# Altium PCB PCB Latest update for Design Rule check Errors Findings.PcbDoc
Units mm, origin at the board's own origin, x right, y up, seen from the top; angles counter-clockwise.
Board outline 55.5 x 58.42 mm, 4 copper layers (Top Layer, Int1 (GND), Int2 (PWR), Bottom Layer), stack 1.57 mm thick; 33 components, 33 nets, 170 pads, 54 vias.
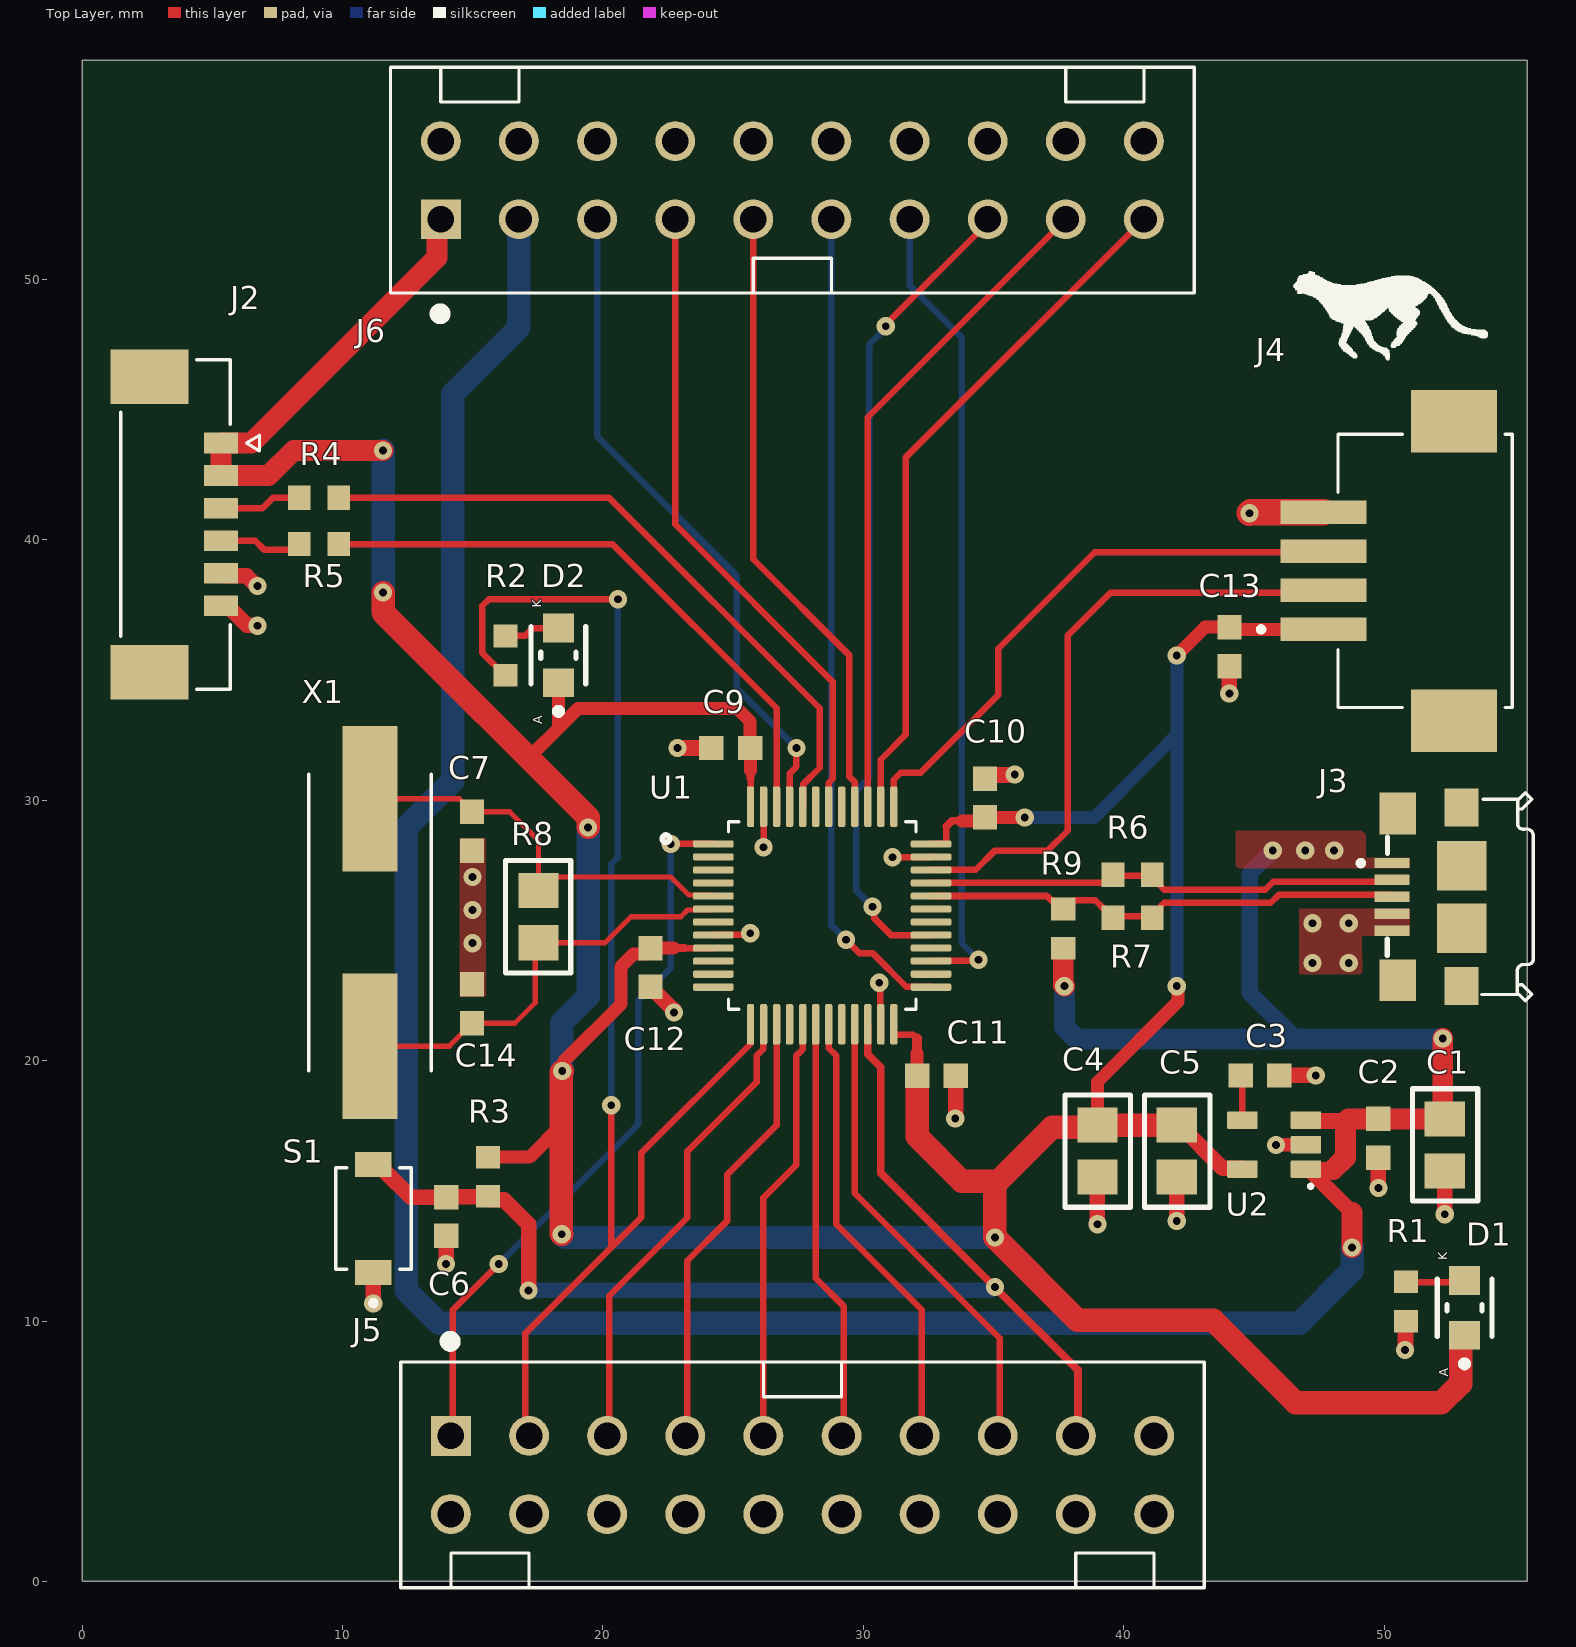
[diagram p0: Top Layer view]
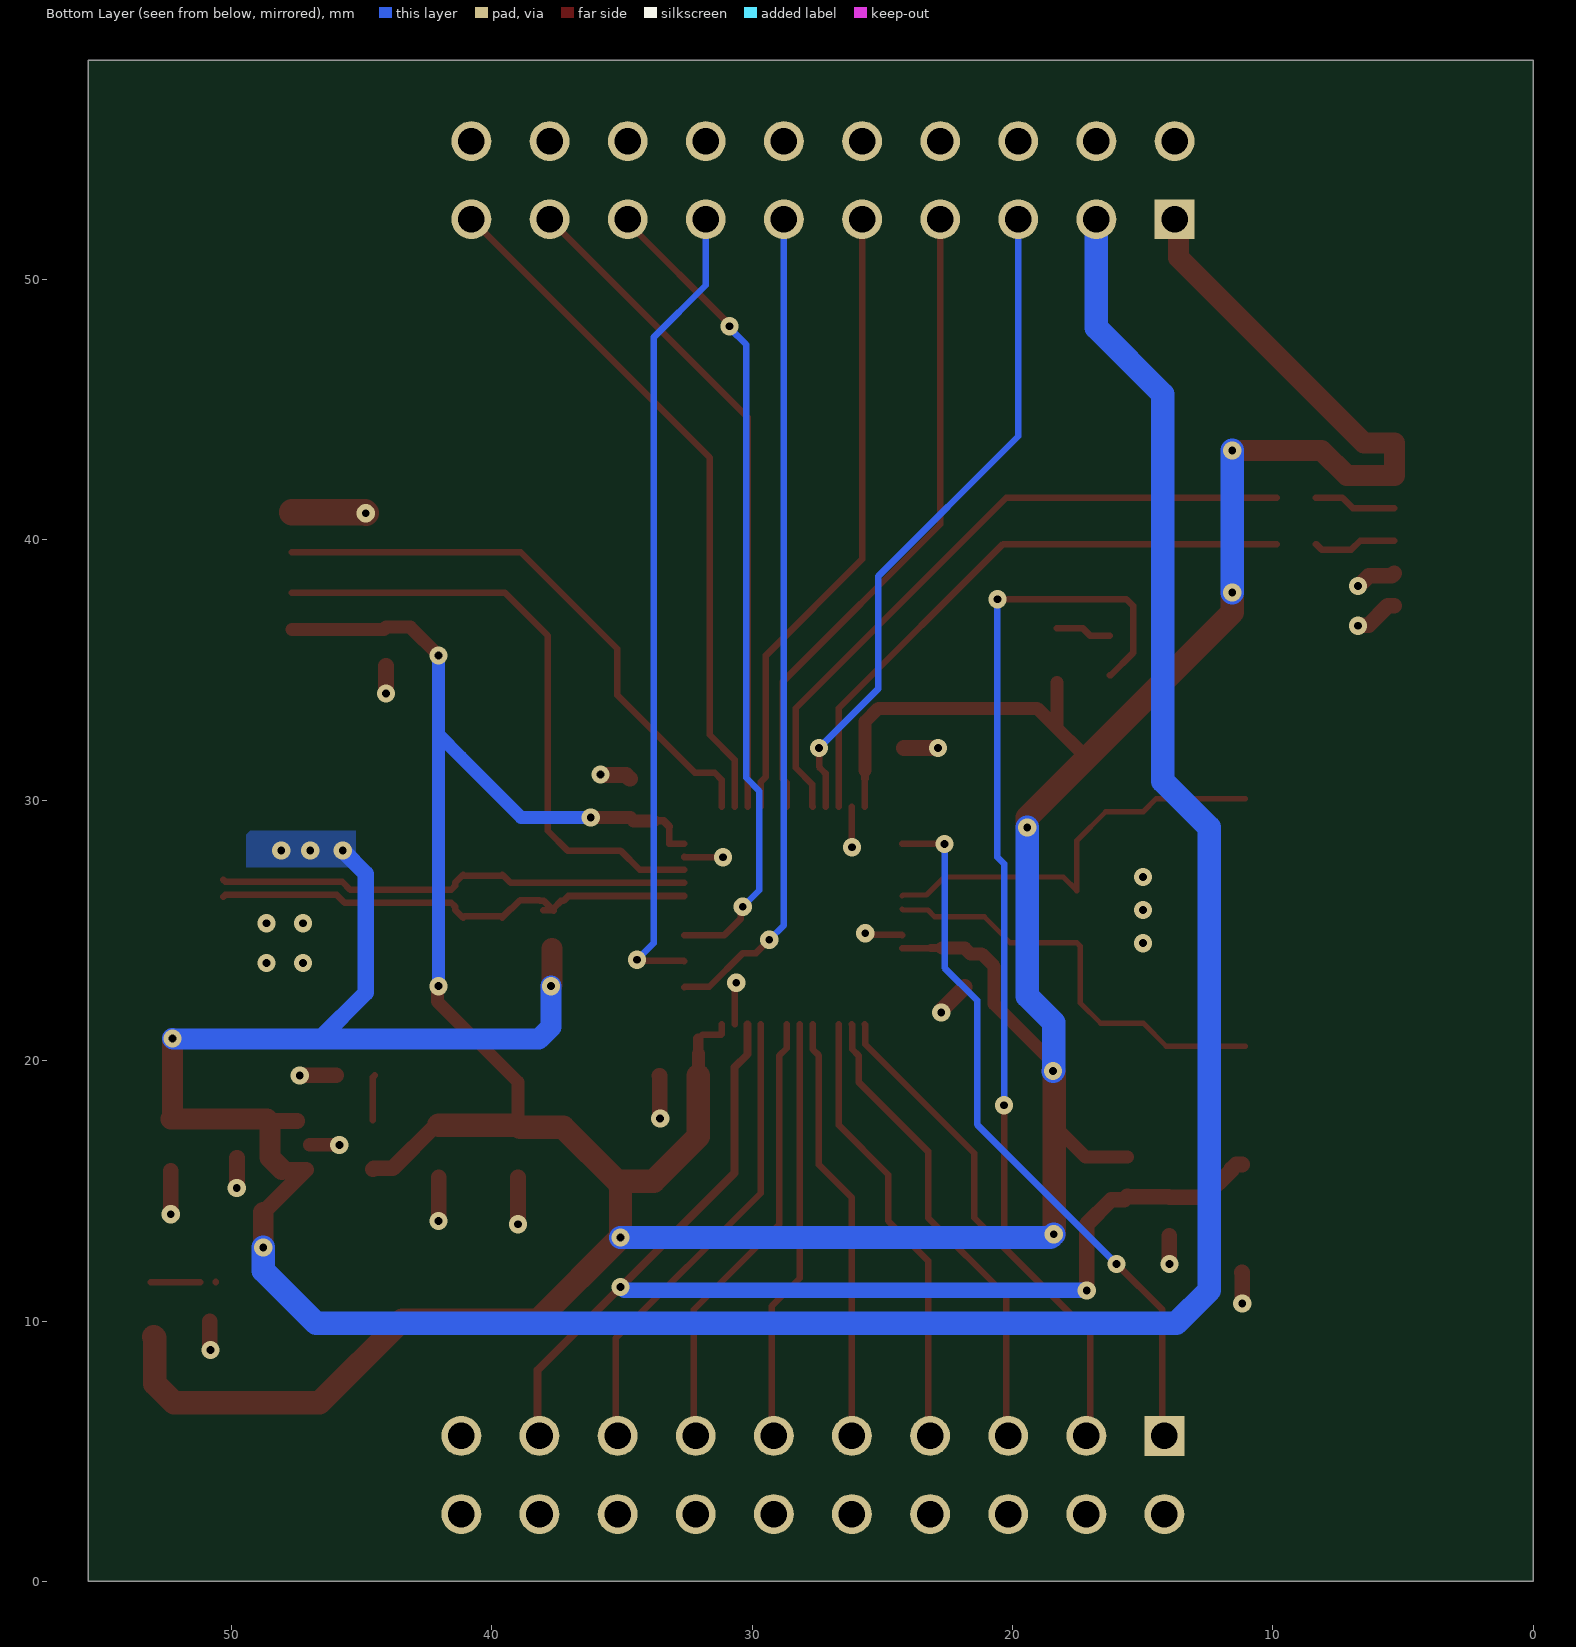
[diagram p1: Bottom Layer view, seen from below]
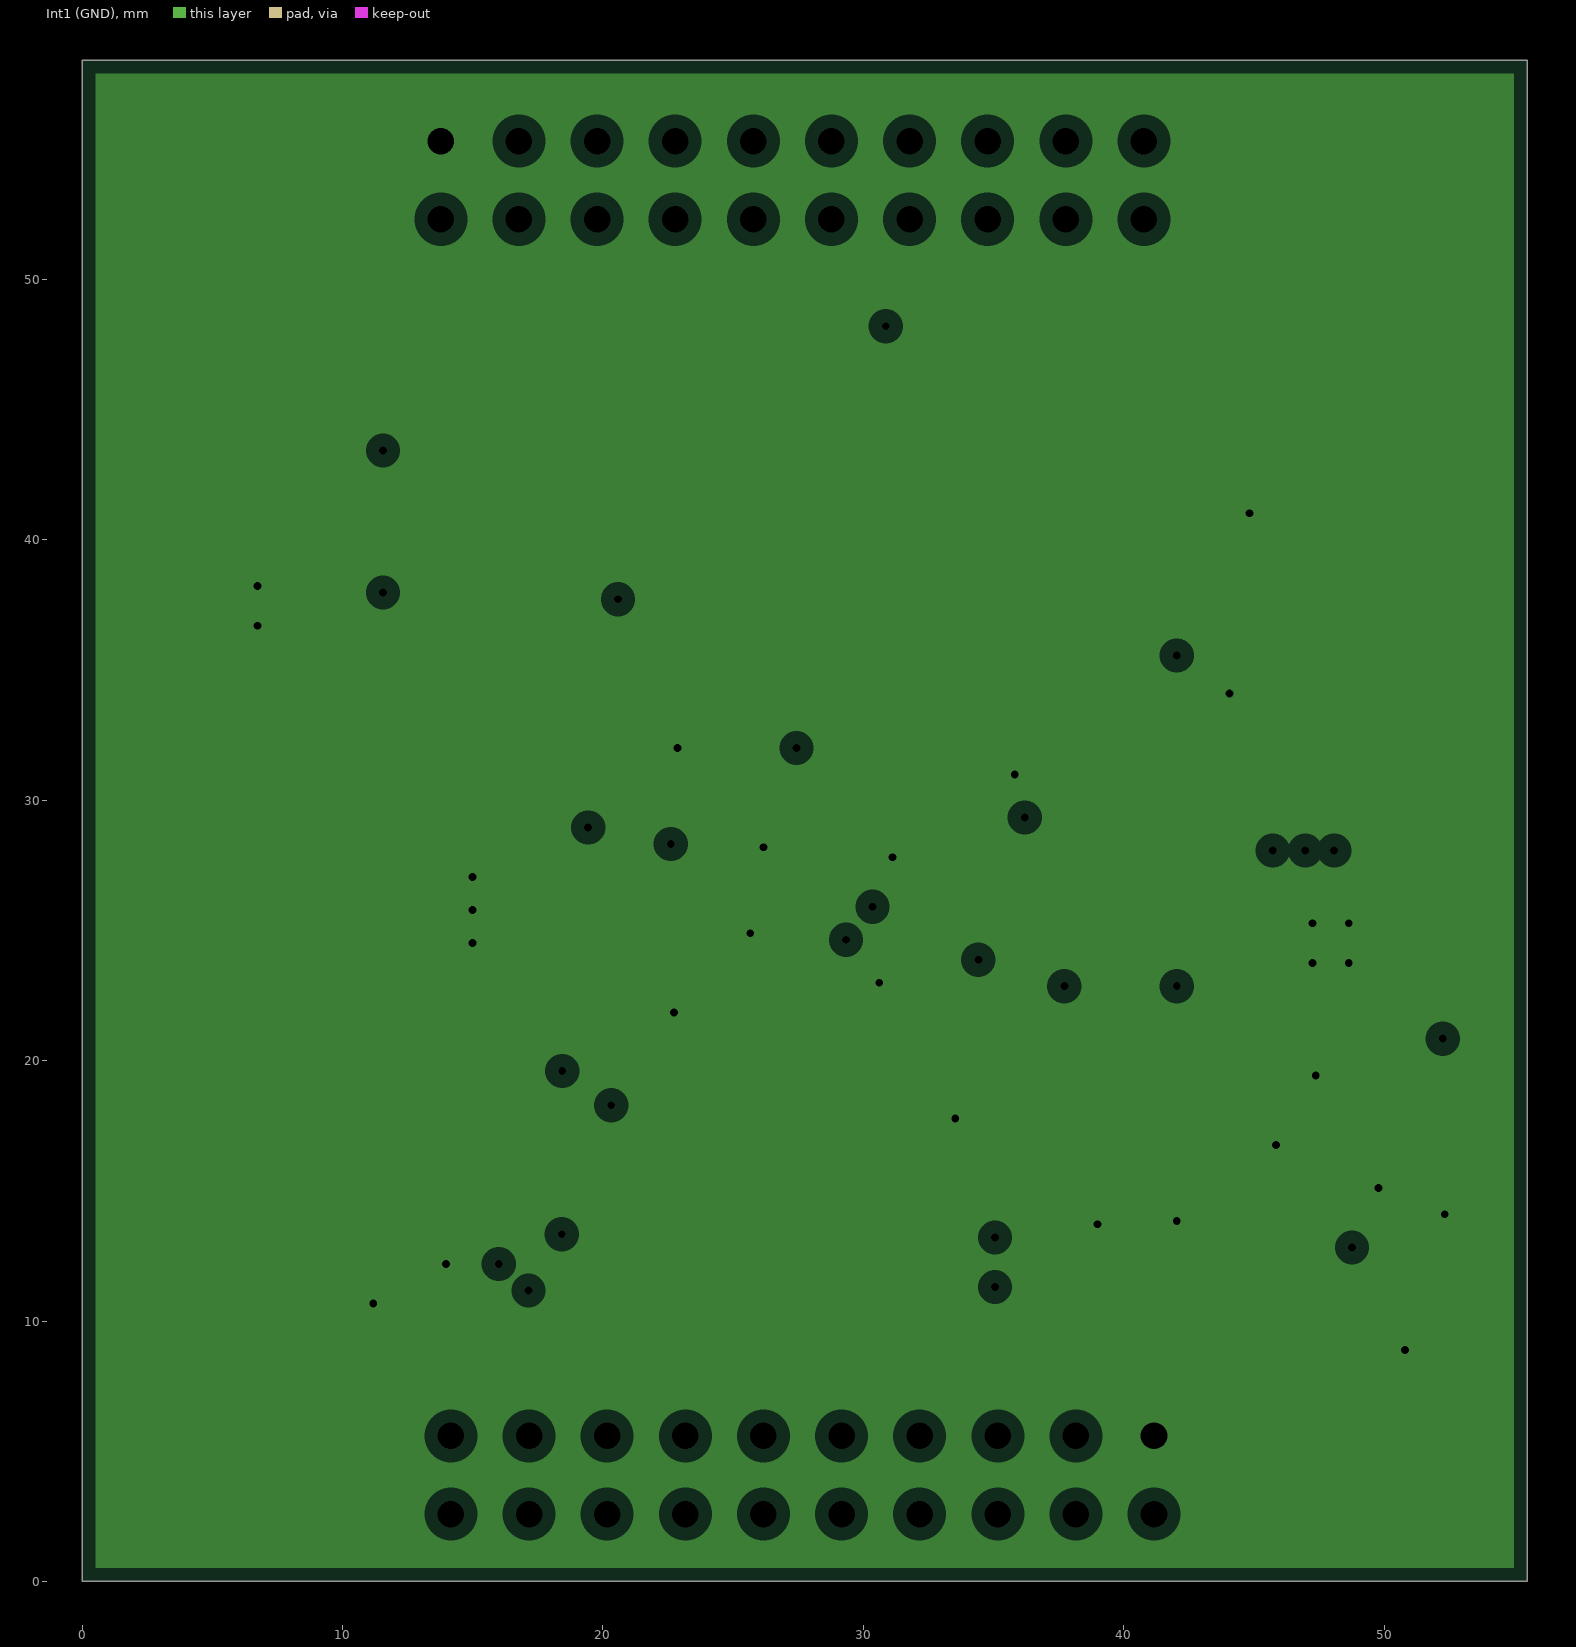
[diagram p2: Int1 (GND), clearances drawn from the general rule]
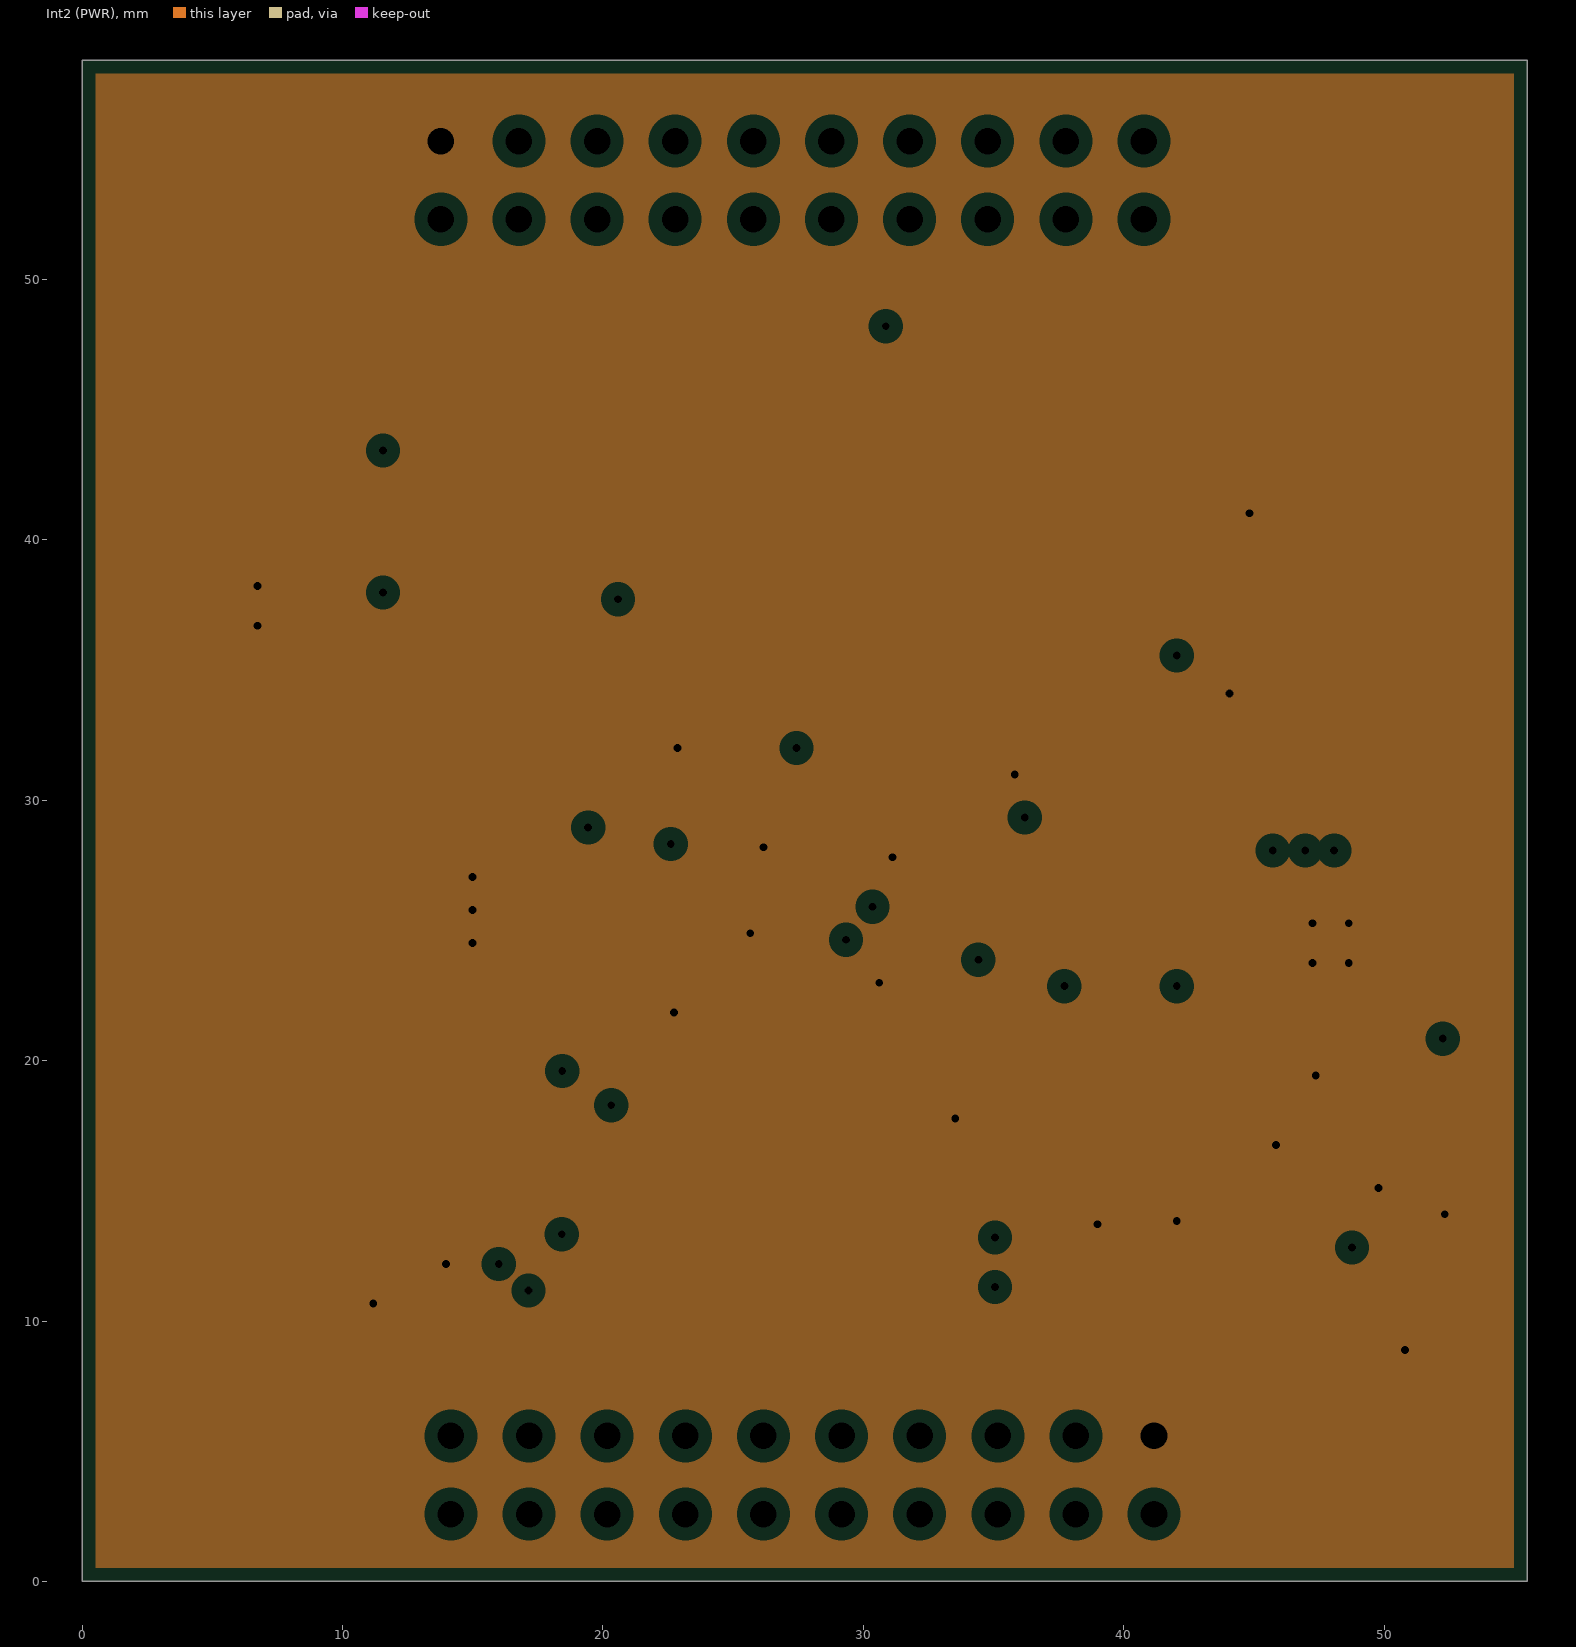
[diagram p3: Int2 (PWR), clearances drawn from the general rule]
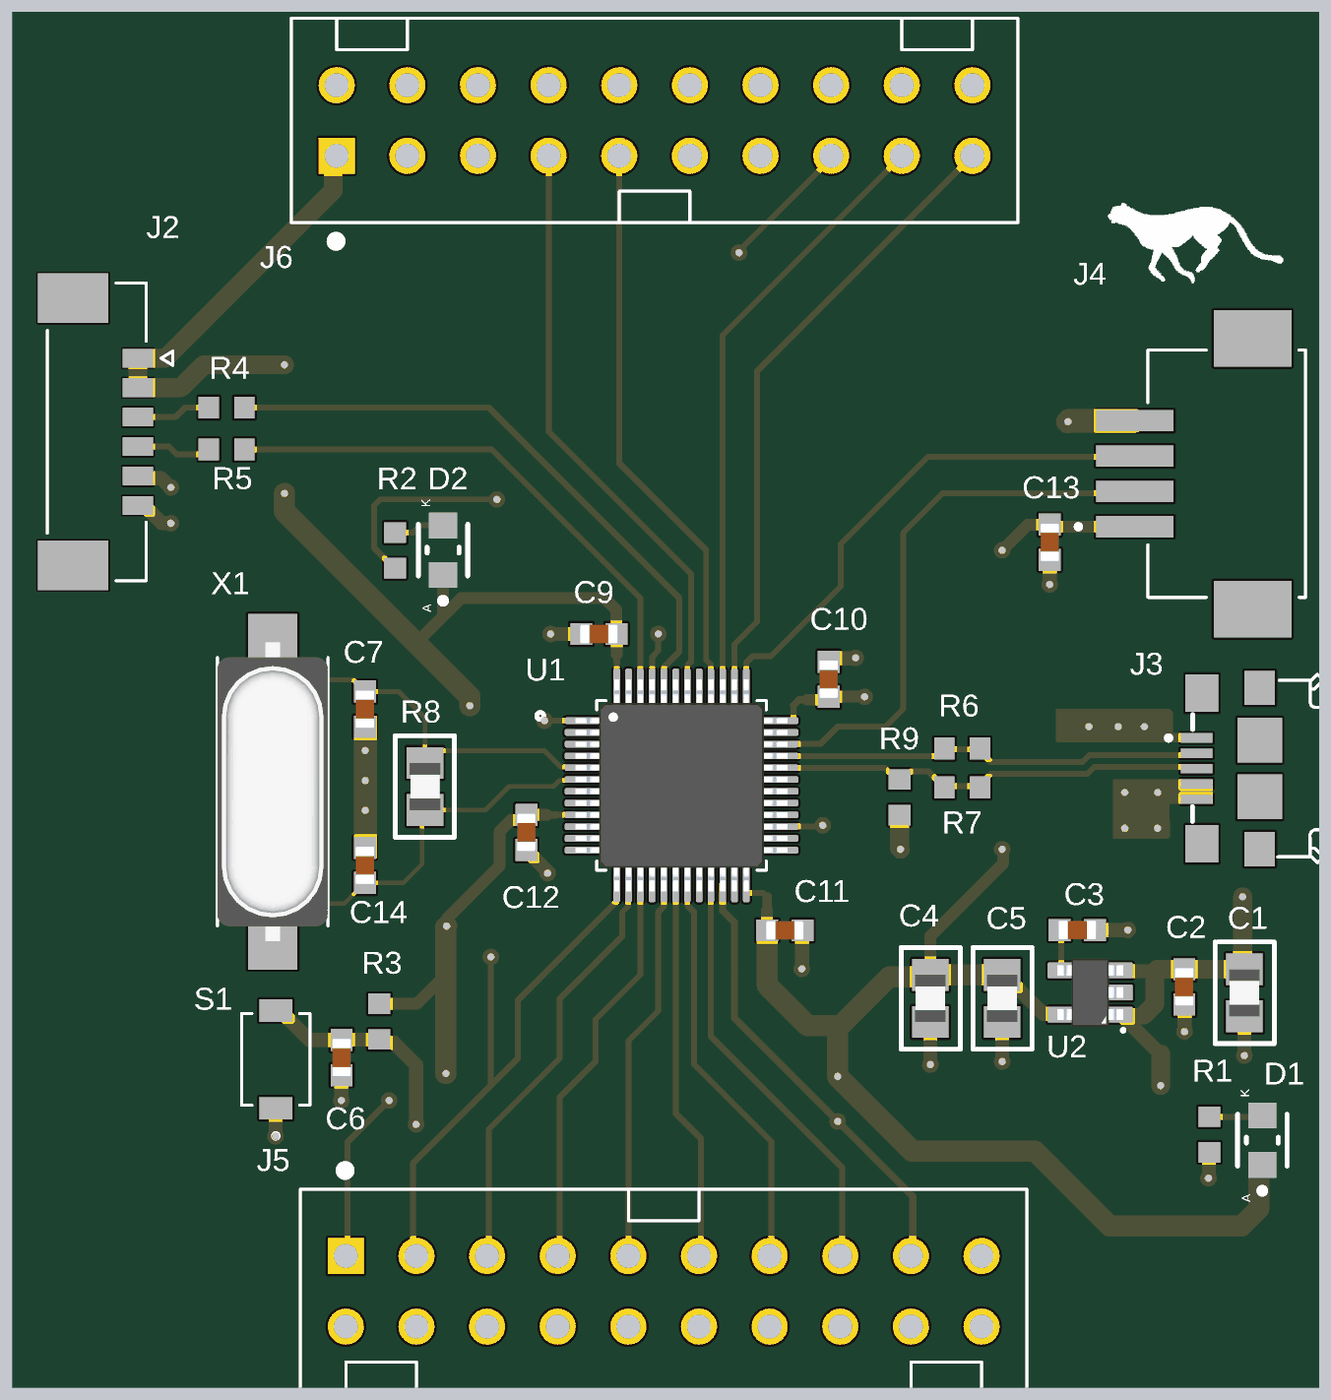
[diagram p4: 3D render of the assembled board from above, using the file's embedded part models]

## Layer stack, top to bottom
Top Solder: solder mask 0.0254, SM-001, Dk 4
Top Layer: signal copper 0.035
Dielectric 1: prepreg 0.2, PP-017, Dk 4.6
Int1 (GND): plane copper 0.0175, net GND
Dielectric 3: core 1.065, Core-039, Dk 4.6
Int2 (PWR): plane copper 0.0175, net GND
Dielectric 5: prepreg 0.2, PP-017, Dk 4.6
Bottom Layer: signal copper 0.035
Bottom Solder: solder mask 0.0254, SM-001, Dk 4

## Board outline
0,0 55.499,0 55.499,58.42 0,58.42

## Design rules (kind name [scope] priority, off if disabled: settings)
Clearance [All] p1: gap=0.152 ignorepadtopadclearanceinfootprint=FALSE
DiffPairsRouting [All] p1: maxlimit=0.254 minlimit=0.254 mostfreqgap=0.254 toplayer_minwidth=0.25 toplayer_maxwidth=0.381 toplayer_prefwidth=0.381 bottomlayer_minwidth=0.25 bottomlayer_maxwidth=0.381 bottomlayer_prefwidth=0.381 maxuncoupledlength=12.7
HoleToHoleClearance [All] p1: gap=0.01 allowstackedmicrovias=TRUE
MinimumSolderMaskSliver [All] p1: minsoldermaskwidth=0.01
PlaneClearance [All] p1: clearance=0.508
PlaneConnect [All] p1: planeconnectstyle=Direct reliefexpansion=0.508 reliefentries=4 reliefconductorwidth=0.254 reliefairgap=0.254
PolygonConnect [All] p1: connectstyle=Direct reliefconductorwidth=0.254 reliefentries=4 polygonreliefangle="90 Angle" airgapwidth=0.254
RoutingVias [All] p1: holewidth=0.711 width=1.27 viastyle="Through Hole" minholewidth=0.711 minwidth=1.27 maxholewidth=0.711 maxwidth=1.27
SilkToSilkClearance [All] p1: silktosilkclearance=0.01
SilkToSolderMaskClearance [IsPad] p1: minsilkscreentomaskgap=0.01 clearancetoexposedcopper=TRUE
SolderMaskExpansion [All] p1: expansion=0.102 istentingtop=FALSE
Width [All] p1: maxlimit=1 minlimit=0.2 preferedwidth=0.3
23 further rules are at their usual default settings.

## Classes and differential pairs
differential pair class DIFF_USB: USBD
differential pair USBD: +USBD_P -USBD_N

## Components (designator, comment, footprint, x,y, rotation, side; value= is the part's Value field where it differs from the comment)
C1 "1000nF" CAPACITOR 52.324,16.764 r270 top
C2 "10nF" CAP_0603_GENERIC 49.784,17.062 r270 top
C3 "22nF" CAP_0603_GENERIC 45.186,19.445 r0 top
C4 "10uF" CAPACITOR 38.989,16.526 r270 top
C5 "10nF" CAPACITOR 42.037,16.526 r270 top
C6 "1uF" CAP_0603_GENERIC 13.97,13.97 r90 top
C7 "20PF" CAP_0603_GENERIC 14.959,28.769 r90 top
C9 "100nF" CAP_0603_GENERIC 24.952,31.99 r180 top
C10 "100nF" CAP_0603_GENERIC 34.657,30.039 r90 top
C11 "100nF" CAP_0603_GENERIC 32.766,19.431 r0 top
C12 "100nF" CAP_0603_GENERIC 21.844,23.62 r270 top
C13 "10nF" CAP_0603_GENERIC 44.069,35.941 r270 top
C14 "20PF" CAP_0603_GENERIC 14.986,22.225 r270 top
D1 "LED" "LED 0508 GREEN SMT" 53.084,10.504 r90 top
D2 "LED" "LED 0508 GREEN SMT" 18.288,35.56 r90 top
J2 "HDR 6Pins wire-Connector" "6PINS HDR WIRE-TO-BOARD" 3.367,40.745 r90 top
J3 "MicroUSB" MICROUSB 52.832,26.289 r270 top
J4 "SMT Type Horizontal-Mount Type, w/o Boss 292228-4" "SMT 4 PINS CONNECTOR" 52.197,38.735 r90 top
J5 "HDR-20-Pins" "20PINS HDR"#1 27.716,3.923 r0 top
J6 "HDR-20-Pins" "20PINS HDR"#2 27.329,53.975 r0 top
R1 "510R" "RESISITOR 0603 20 OHM" 50.8,10.795 r270 top
R2 "510R" "RESISITOR 0603 20 OHM" 16.216,35.6 r270 top
R3 "10K" "RESISITOR 0603 20 OHM" 15.621,15.494 r90 top
R4 "100K" "RESISITOR 0603 20 OHM" 9.144,41.656 r180 top
R5 "100K" "RESISITOR 0603 20 OHM" 9.144,39.878 r180 top
R6 "20R" "RESISITOR 0603 20 OHM" 40.386,27.178 r180 top
R7 "20R" "RESISITOR 0603 20 OHM" 40.386,25.527 r180 top
R8 "1M" CAPACITOR 17.526,25.527 r90 top
R9 "1.5K" "RESISITOR 0603 20 OHM" 37.719,25.019 r90 top
S1 "Tact Switch 2Pins" "TACT SWITCH 2PINS" 11.049,13.843 r90 top
U1 "STM32F103C8T6" STM32-NEW 28.321,25.527 r0 top
U2 "Voltage Regulator 300mA Ultra Low Noise" "RT9193 VOLTAGE REGULATOR" 45.72,16.764 r180 top (schematic designator J1)
X1 "8MHz" "CRYSTAL OSC 8MHZ" 11.303,25.019 r90 top

## Footprints (in the part's own frame and the unit in brackets; to place one, negate y for a bottom-side part, rotate by r counter-clockwise, add the part's x,y. Pads: shape width x height; smd on the part's side, far side on the other; paste and mask are expansions set on the pad)
"6PINS HDR WIRE-TO-BOARD" [mm]
  rect 0.8x1.3 smd mask+0.076: 1(2.97,-1.967) 2(1.72,-1.967) 3(0.47,-1.967) 4(-0.78,-1.967) 5(-2.03,-1.967) 6(-3.28,-1.967)
  rect 2.1x3 smd mask+0.076: S1(-5.83,0.783) S2(5.52,0.783)
  silkscreen extent -6.48,-3.45 6.17,1.88
"20PINS HDR"#1 [mm]
  rect 1.53x1.53 hole 1.02: 1(-13.554,1.665)
  round 1.53 hole 1.02: 2(-13.554,-1.335) 3(-10.554,1.665) 4(-10.554,-1.335) 5(-7.554,1.665) 6(-7.554,-1.335) 7(-4.554,1.665) 8(-4.554,-1.335) 9(-1.554,1.665) 10(-1.554,-1.335) 11(1.446,1.665) 12(1.446,-1.335) 13(4.446,1.665) 14(4.446,-1.335) 15(7.446,1.665) 16(7.446,-1.335) 17(10.446,1.665) 18(10.446,-1.335) 19(13.446,1.665) 20(13.446,-1.335)
  silkscreen extent -15.48,-4.17 15.38,5.49
"20PINS HDR"#2 [mm]
  rect 1.53x1.53 hole 1.02: 1(-13.554,-1.665)
  round 1.53 hole 1.02: 2(-13.554,1.335) 3(-10.554,-1.665) 4(-10.554,1.335) 5(-7.554,-1.665) 6(-7.554,1.335) 7(-4.554,-1.665) 8(-4.554,1.335) 9(-1.554,-1.665) 10(-1.554,1.335) 11(1.446,-1.665) 12(1.446,1.335) 13(4.446,-1.665) 14(4.446,1.335) 15(7.446,-1.665) 16(7.446,1.335) 17(10.446,-1.665) 18(10.446,1.335) 19(13.446,-1.665) 20(13.446,1.335)
  silkscreen extent -15.48,-5.49 15.38,4.17
CAP_0603_GENERIC [mm]
  rect 0.94x0.93 smd: 1(-0.702,-0.014) 2(0.788,-0.014)
  body extent -0.76,-0.41 0.84,0.39, height 0.87
CAPACITOR [mm]
  rect 1.35x1.55 smd: 1(-1,0) 2(1,0)
  silkscreen extent -2.16,-1.24 2.16,1.27, body extent -1,-0.65 1,0.66, height 0.73
"CRYSTAL OSC 8MHZ" [mm]
  rect 5.6x2.1 smd: 1(-4.466,0.248) 2(5.034,0.248)
  silkscreen extent -5.42,-2.1 5.98,2.6, body extent -6.07,-2.1 6.63,2.6, height 4.06
"LED 0508 GREEN SMT" [mm]
  rect 1.1x1.2 smd paste+0 mask+0: 1(-1.047,-0.002) 2(1.053,-0.002)
  silkscreen extent -2.27,-1.05 1.1,1.05, body extent -1.7,-0.78 1.7,0.77, height 0.25
MICROUSB [mm]
  rect 0.4x1.35 smd: 1(-1.301,-2.532) 2(-0.651,-2.532) 3(-0.001,-2.532) 4(0.649,-2.532) 5(1.299,-2.532)
  rect 1.6x1.4 smd: 6(-3.201,-2.307) 7(3.199,-2.307)
  rect 1.45x1.3 smd: 8(3.424,0.143) 9(-3.426,0.143)
  rect 1.9x1.9 smd: 10(-1.201,0.143) 11(1.199,0.143)
  silkscreen extent -4,-3.83 4,2.89
"RESISITOR 0603 20 OHM" [mm]
  rect 0.87x0.93 smd: 1(-0.708,0.04) 2(0.802,0.04)
"RT9193 VOLTAGE REGULATOR" [mm]
  rrect12% 1.17x0.67 smd: 1(-1.277,0.931) 2(-1.277,-0.009) 3(-1.277,-0.949) 4(1.163,-0.949) 5(1.163,0.931)
  silkscreen extent -1.53,1.52 -1.39,1.66, body extent -1.45,-1.46 1.34,1.44, height 1.3
"SMT 4 PINS CONNECTOR" [mm]
  rect 0.9x3.3 smd: 1(-2.176,4.523) 2(-0.676,4.523) 3(0.824,4.523) 4(2.324,4.523)
  rect 2.4x3.3 smd: S1(-5.676,-0.477) S2(5.824,-0.477)
  silkscreen extent -5.18,-2.73 5.32,7.02
STM32-NEW [mm]
  rrect50% 1.56x0.28 smd: 1(-4.081,2.795) 2(-4.081,2.295) 3(-4.081,1.795) 4(-4.081,1.295) 5(-4.081,0.795) 6(-4.081,0.295) 7(-4.081,-0.205) 8(-4.081,-0.705) 9(-4.081,-1.205) 10(-4.081,-1.705) 11(-4.081,-2.205) 12(-4.081,-2.705) 25(4.279,-2.705) 26(4.279,-2.205) 27(4.279,-1.705) 28(4.279,-1.205) 29(4.279,-0.705) 30(4.279,-0.205) 31(4.279,0.295) 32(4.279,0.795) 33(4.279,1.295) 34(4.279,1.795) 35(4.279,2.295) 36(4.279,2.795)
  rrect50% 0.28x1.56 smd: 13(-2.651,-4.135) 14(-2.151,-4.135) 15(-1.651,-4.135) 16(-1.151,-4.135) 17(-0.651,-4.135) 18(-0.151,-4.135) 19(0.349,-4.135) 20(0.849,-4.135) 21(1.349,-4.135) 22(1.849,-4.135) 23(2.349,-4.135) 24(2.849,-4.135) 37(2.849,4.225) 38(2.349,4.225) 39(1.849,4.225) 40(1.349,4.225) 41(0.849,4.225) 42(0.349,4.225) 43(-0.151,4.225) 44(-0.651,4.225) 45(-1.151,4.225) 46(-1.651,4.225) 47(-2.151,4.225) 48(-2.651,4.225)
  silkscreen extent -6.05,-3.56 3.7,3.64, body extent -4.4,-4.46 4.6,4.54, height 1.6
"TACT SWITCH 2PINS" [mm]
  rect 0.95x1.4 smd: 1(-1.981,-0.137) 2(2.169,-0.137)
  silkscreen extent -3.26,-1.59 2.04,1.31

## Part data
C1: library part Cap_0805_100nF
C2: library part CAP_0603_Generic, "10nF Â±5% 16V Ceramic Capacitor X7R 0603 (1608 Metric)"
C3: library part CAP_0603_Generic, "22nF Â±5% 16V Ceramic Capacitor X7R 0603 (1608 Metric)"
C4: library part Cap_0805_100nF, "10uF C"
C5: library part Cap_0805_100nF, "10 nF Global Cap"
C6: library part CAP_0603_Generic, "1uF Â±5% 16V Ceramic Capacitor X7R 0603 (1608 Metric)"
C7 C9 C10 C11 C12 C13 C14: library part CAP_0603_Generic, "0.022 ÂµF Â±5% 16V Ceramic Capacitor X7R 0603 (1608 Metric)"
D1 D2: library part "LED Green Wurth Elektronik 150080GS75000", "WURTH ELEKTRONIK - 150080GS75000 - LED, Green, SMD, 0805, 30 mA, 3.2 V, 520 nm"
J2: "Connector Header Surface Mount 6 position 0.049 (1.25mm)"
J3: "Micro USB / 1981568-1 / USB - micro B USB 2.0 Receptacle Connector 5 Position Surface Mount, Right Angle"
J4: "Conn Shrouded Header HDR 4 POS 1.5mm Solder RA SMD Box/Tape"
R1 R2 R3 R4 R5 R6 R7 R9: library part "Resistor 0603 20 OHM", "RES SMD 20 OHM 0.1% 1/16W 0603"
R8: library part "Resistor D", "Res Thin Film 0805 13K Ohm 0.1% 1/10W Â±10ppm/Â°C Molded SMD SMD Paper T/R"
S1: "actile Switch SPST-NO Top Actuated Surface Mount"
U1: library part "STM32 2nd-New", "ARMÂ® CortexÂ®-M3 STM32F1 Microcontroller IC 32-Bit 72MHz 64KB (64K x 8) FLASH 48-LQFP (7x7)"
U2: "Linear Voltage Regulator IC Positive Fixed 1 Output 300mA TSOT-23-5"
X1: library part "Crystal OSC 8Mhz", "HC/49US (AT49) SMD LOW PROFILE CRYSTAL"

## Via types
v1: diameter 0.7, hole 0.3, Top Layer to Bottom Layer, tented both sides, 54 vias

## Nets (pads, with @x,y where several pads share a name; then routed paths per layer and width w, separated by ;. In a path a pad name is that pad's centre, name@x,y a point inside that pad or via, vN(x,y) a via of type N, cw(c..) or ccw(c..) an arc to the next point about the centre after c; other vN are vias at no path point)
5V: C1.1 C2.1 J3.1 J6.3 R9.1 U2.1 U2.3 | length 122.3
  Top Layer w0.6: U2.3@47.462,17.681 48.546,17.681 ; 48.045,15.815 47.117,15.815 48.768,14.164
  Top Layer w0.8: R9.1 37.679,22.9 v1(37.719,22.86) ; 48.045,15.815 48.514,16.283 48.514,17.648 48.546,17.681 48.63,17.764 C2.1 C1.1 52.251,17.837 v1(52.251,20.844) ; v1(48.768,12.827) 48.768,14.164
  Bottom Layer w0.635: v1(45.72,28.067) 44.831,27.178 44.831,22.606 46.609,20.828
  Bottom Layer w0.8: v1(37.719,22.86) 37.719,21.297 38.188,20.828 46.609,20.828 52.235,20.828 v1(52.251,20.844)
  Bottom Layer w0.9: J6.3 16.775,48.144 14.224,45.593 14.224,30.734 12.446,28.956 12.446,11.176 13.716,9.906 46.736,9.906 48.768,11.938 v1(48.768,12.827)
  other v1: 46.968,28.067 48.079,28.067
BOOT0: R4.1 U1.44 | length 25.9
  Top Layer w0.25: R4.1 20.233,41.616 28.321,33.528 28.321,31.242 27.685,30.606 27.685,29.767 U1.44
BOOT1: R5.1 U1.46 | length 23.2
  Top Layer w0.25: R5.1 20.36,39.838 26.67,33.528 U1.46
GND: C1.2 C2.2 C3.2 C4.2 C5.2 C6.1 C7.1 C9.2 C10.2 C11.2 C12.2 C13.2 C14.1 J2.5 J2.6 J3.4 J3.5 J4.4 J5.19 J6.2 R1.2 S1.1 U1.8 U1.23 U1.35 U1.47 U2.2 | length 31.1
  Top Layer w0.25: U1.8 24.255,24.837 25.599,24.837 v1(25.654,24.892) ; v1(26.162,28.194) 26.166,28.198 26.166,29.748 U1.47 ; v1(30.607,22.987) 30.655,22.939 30.655,21.407 U1.23 ; v1(31.115,27.813) 31.119,27.817 32.595,27.817 U1.35
  Top Layer w0.508: v1(45.847,16.764) 45.852,16.769 46.992,16.769 U2.2
  Top Layer w0.6: J2.6 5.584,37.465 6.327,36.722 6.712,36.722 v1(6.731,36.703) ; J2.5 5.434,38.615 6.316,38.615 6.704,38.227 v1(6.731,38.227) ; v1(11.176,10.668) 11.181,10.673 11.181,11.857 S1.1 ; v1(13.97,12.192) 13.977,12.199 13.977,13.261 C6.1 ; C12.2 21.83,22.827 22.714,21.943 22.714,21.863 v1(22.733,21.844) ; v1(22.86,32.004) C9.2 ; v1(33.528,17.78) 33.541,17.793 33.541,19.404 C11.2 ; C10.2 34.694,30.827 34.836,30.969 35.795,30.969 v1(35.814,30.988) ; v1(38.989,13.716) C4.2 ; v1(42.037,13.843) C5.2 ; v1(44.055,34.103) C13.2 ; C3.2 v1(47.371,19.431) ; C2.2 49.777,16.267 49.777,15.12 v1(49.784,15.113) ; v1(50.8,8.89) 50.819,8.909 R1.2@50.819,9.993 ; v1(52.324,14.097) C1.2
  Top Layer w1: v1(44.831,41.021) 44.869,41.059 J4.4
  other v1: 47.244,23.749 48.641,23.749 14.986,24.511 47.244,25.273 48.641,25.273 14.986,25.781 14.986,27.051
NetC3_1: C3.1 U2.4 | length 1.7
  Top Layer w0.25: C3.1 44.557,19.358 U2.4
NetD1_2: D1.2 R1.1 | length 1.9
  Top Layer w0.25: R1.1@50.586,11.503 R1.1@50.591,11.498 ; R1.1@51.181,11.498 D1.2@53.086,11.498
NetD2_2: D2.2 R2.1 | length 2.2
  Top Layer w0.25: R2.1 17.004,36.308 17.309,36.613 D2.2
NetJ2_3: J2.3 R4.2 | length 3.2
  Top Layer w0.25: J2.3 6.925,41.215 7.326,41.616 R4.2
NetJ2_4: J2.4 R5.2 | length 3.2
  Top Layer w0.25: J2.4 6.644,39.965 6.985,39.624 8.128,39.624 R5.2
OSCIN: C7.2 R8.2 U1.5 X1.2 | length 16.3
  Top Layer w0.2: X1.2 14.481,30.053 14.972,29.562 C7.2 16.417,29.557 17.526,28.448 R8.2 18.05,27.051 22.606,27.051 23.295,26.362 24.2,26.362 U1.5
OSCOUT: C14.2 R8.1 U1.6 X1.1 | length 16.6
  Top Layer w0.2: X1.1 14.094,20.553 14.972,21.432 C14.2 16.611,21.437 17.399,22.225 17.399,24.4 R8.1 20.082,24.527 21.082,25.527 22.987,25.527 23.242,25.782 24.2,25.782 U1.6
PA4: J5.9 U1.17 | length 16
  Top Layer w0.25: J5.9@26.241,6.096 26.162,6.175 26.162,14.732 27.432,16.002 27.432,20.193 27.67,20.431 U1.17
PA5: J5.11 U1.18 | length 15.7
  Top Layer w0.25: U1.18 28.17,11.643 29.241,10.572 J5.11@29.241,6.096
PA8: J6.15 U1.29 | length 31.7
  Top Layer w0.25: v1(30.353,25.908) 30.425,25.836 30.425,25.455 31.058,24.822 U1.29 ; v1@30.861,48.133 30.861,48.265 34.775,52.178 J6.15
  Bottom Layer w0.25: v1(30.353,25.908) 29.718,26.543 29.718,30.353 30.226,30.861 30.226,47.498 v1@30.861,48.133
  other v1: 30.861,48.199
PA11: J6.13 U1.27 | length 31.4
  Top Layer w0.25: U1.27 32.615,23.837 34.378,23.837 v1(34.417,23.876)
  Bottom Layer w0.25: J6.13 31.775,49.78 33.782,47.772 33.782,24.511 v1(34.417,23.876)
PA15: J6.11 U1.25 | length 31.9
  Top Layer w0.25: v1(29.337,24.638) 29.845,24.13 30.351,24.13 31.645,22.837 32.585,22.837 U1.25
  Bottom Layer w0.25: J6.11 28.775,25.2 v1(29.337,24.638)
PB0: J5.13 U1.19 | length 16.8
  Top Layer w0.25: U1.19 28.67,20.479 28.956,20.193 28.956,13.716 32.241,10.431 J5.13@32.241,6.096
PB4: J6.9 U1.40 | length 24.2
  Top Layer w0.25: J6.9 25.775,39.249 29.464,35.56 29.464,30.905 29.67,30.7 U1.40
PB6: J6.7 U1.42 | length 25.1
  Top Layer w0.25: J6.7 22.775,40.598 28.829,34.544 28.829,30.825 28.67,30.666 U1.42
PB8: J6.5 U1.45 | length 25.8
  Top Layer w0.25: U1.45 27.174,29.756 27.174,31.027 27.299,31.152 27.299,31.154 27.424,31.279 27.424,31.996 v1(27.432,32.004)
  Bottom Layer w0.25: J6.5 19.775,43.979 25.146,38.608 25.146,34.29 v1(27.432,32.004)
PB10: J5.15 U1.21 | length 17.6
  Top Layer w0.25: U1.21 29.67,14.907 35.241,9.336 J5.15@35.241,6.096
PB13: J6.19 U1.38 | length 26.7
  Top Layer w0.25: U1.38 30.67,31.559 31.623,32.512 31.623,43.158 J6.19
PB15: J6.17 U1.39 | length 25.7
  Top Layer w0.25: U1.39 30.17,44.705 J6.17
PC13: J5.3 R2.2 U1.13 | length 52.3
  Top Layer w0.25: R2.2 16.226,34.798 15.367,35.657 15.367,37.465 15.621,37.719 v1(20.574,37.719) ; J5.3@17.241,6.096 17.018,6.319 17.018,9.525 20.32,12.827 ; v1(20.32,18.288) 20.32,12.827 ; U1.13 25.655,21.377 25.655,20.63 21.463,16.439 21.463,13.97 20.32,12.827
  Bottom Layer w0.25: v1(20.32,18.288) 20.32,27.556 20.574,27.81 v1(20.574,37.719)
PC14: J5.5 U1.14 | length 17.8
  Top Layer w0.25: J5.5@20.241,6.096 20.241,10.97 23.241,13.97 23.241,16.51 25.908,19.177 25.908,20.193 26.155,20.44 26.155,21.377 U1.14
PC15: J5.7 U1.15 | length 16.7
  Top Layer w0.25: J5.7@23.241,6.096 23.241,12.319 24.765,13.843 24.765,15.621 26.67,17.526 26.67,17.78 U1.15
RESET: C6.2 J5.17 R3.1 S1.2 U1.22 | length 46.1
  Top Layer w0.3: U1.22 30.17,20.249 30.67,19.748 30.67,15.684 v1(35.052,11.303) 38.241,8.114 J5.17@38.241,6.096
  Top Layer w0.6: S1.2 11.411,16.012 11.586,15.837 11.586,15.791 12.619,14.758 C6.2 13.997,14.772 15.567,14.772 R3.1 15.716,14.651 16.21,14.651 17.145,13.716 v1(17.145,11.176)
  Bottom Layer w0.6: v1(17.145,11.176) 34.898,11.176 35.025,11.303 v1(35.052,11.303)
SWCLK: J4.3 U1.37 | length 22.2
  Top Layer w0.25: U1.37 31.17,30.789 31.432,31.051 32.194,31.051 35.179,34.036 35.179,35.814 38.885,39.52 J4.3@47.674,39.52
SWDIO: J4.2 U1.34 | length 23.9
  Top Layer w0.25: U1.34 32.607,27.329 34.314,27.329 35.052,28.067 37.084,28.067 37.846,28.829 37.846,36.322 39.497,37.973 J4.2@47.674,37.973
USBD_N: J3.2 R6.1 R6.2 U1.33 | length 18.3
  Top Layer w0.25: U1.33@32.6,26.826 39.274,26.826 39.584,27.136 R6.2 ; R6.2@39.584,27.108 41.064,27.108 R6.1 41.404,26.828 41.404,26.711 41.551,26.565 45.437,26.565 45.739,26.867 50.227,26.867 J3.2
USBD_P: J3.3 R7.1 R7.2 R9.2 U1.32 | length 19.2
  Top Layer w0.25: U1.32 37.051,26.322 37.242,26.131 37.339,26.131 37.616,25.854 37.616,25.757 37.639,25.781 R9.2@38.013,25.781 ; R9.2 37.989,26.131 38.134,26.131 38.166,26.162 38.909,26.162 39.244,25.827 39.274,25.827 39.584,25.517 R7.2 ; R7.2@39.614,25.547 41.034,25.547 R7.1 41.404,25.797 41.404,25.914 41.551,26.061 45.645,26.061 45.948,26.363 50.227,26.363 J3.3
VBAT: J5.1 U1.1 | length 27.3
  Top Layer w0.25: J5.1@14.241,6.096 14.241,10.431 v1(16.002,12.192) ; v1(22.606,28.321) U1.1
  Bottom Layer w0.25: v1(16.002,12.192) 21.359,17.549 21.359,22.314 22.606,23.561 v1(22.606,28.321)
VCC3V3: C4.1 C5.1 C9.1 C10.1 C11.1 C12.1 C13.1 D1.1 D2.1 J2.1 J2.2 J4.1 J6.1 R3.2 U1.9 U1.24 U1.36 U1.48 U2.5 | length 178.8
  Top Layer w0.25: 23.134,24.32 23.135,24.322 U1.9 ; 25.667,30.834 25.67,30.832 U1.48 ; U1.24 31.17,21.016 31.185,21.001 31.893,21.001 32.061,20.834 ; U1.36 33.17,28.322 33.185,28.337 33.185,28.994
  Top Layer w0.3: 22.708,24.32 23.134,24.32 ; 25.667,30.834 25.667,31.144 ; 33.185,28.994 33.401,29.21 33.782,29.21
  Top Layer w0.4: 32.052,20.274 32.061,20.283 32.061,20.833
  Top Layer w0.5: R3.2 17.185,16.296 18.402,17.513 18.44,17.551 ; 17.399,31.877 18.29,32.768 ; D2.1 18.29,32.768 ; v1(18.44,19.597) 18.478,19.635 18.478,19.952 20.701,22.175 20.701,23.622 21.181,24.102 21.615,24.102 21.83,24.317 C12.1 C12.1 22.708,24.32 ; 25.667,31.144 25.667,31.991 C9.1 25.654,33.02 25.146,33.528 19.05,33.528 18.29,32.768 ; 32.052,20.274 32.052,19.43 C11.1 ; 33.782,29.21 34.544,29.21 C10.1 v1(36.195,29.337) ; C4.1 38.989,19.177 42.077,22.265 42.077,22.679 42.075,22.68 42.075,22.822 v1(42.037,22.86) ; v1(42.037,35.56) 43.12,36.643 C13.1 44.139,36.559 J4.1
  Top Layer w0.6: C5.1 42.137,17.526 43.795,15.868 44.522,15.868 U2.5
  Top Layer w0.8: v1(11.557,43.434) 8.128,43.434 7.159,42.465 J2.2 J2.1 6.504,43.715 13.623,50.834 13.623,52.159 J6.1
  Top Layer w0.9: v1(11.557,37.973) 11.557,37.211 19.431,29.337 v1(19.431,28.956) ; v1(18.415,13.335) 18.402,13.348 18.402,17.513 18.402,19.559 v1(18.44,19.597) ; C11.1 32.064,17.085 33.782,15.367 35.179,15.367 37.257,17.445 38.908,17.445 C4.1 C5.1 ; 35.052,14.986 v1(35.052,13.208) 38.227,10.033 43.434,10.033 46.609,6.858 52.197,6.858 52.936,7.597 52.936,9.357 D1.1@52.977,9.398
  Bottom Layer w0.5: v1(36.195,29.337) 38.862,29.337 41.182,31.657 42.037,32.512 ; v1(42.037,22.86) 42.037,32.512 ; v1(42.037,35.56) 42.037,32.512
  Bottom Layer w0.9: v1(11.557,37.973) v1(11.557,43.434) ; v1(18.415,13.335) 18.542,13.208 v1(35.052,13.208) ; v1(18.44,19.597) 18.415,19.622 18.415,21.463 19.431,22.479 v1(19.431,28.956)
pads on no net: J2.S1 J2.S2 J3.6 J3.7 J3.8 J3.9 J3.10 J3.11 J4.S1 J4.S2 J5.2 J5.4 J5.6 J5.8 J5.10 J5.12 J5.14 J5.16 J5.18 J5.20 J6.4 J6.6 J6.8 J6.10 J6.12 J6.14 J6.16 J6.18 J6.20 U1.2 U1.3 U1.4 U1.7 U1.10 U1.11 U1.12 U1.16 U1.20 U1.26 U1.28 U1.30 U1.31 U1.41 U1.43

## Polygon pours and split planes (outlines as drawn)
5V on Bottom Layer "5V_L04_P004" (solid, remove dead copper, pour order 4): 49.421,27.425 45.212,27.425 45.212,28.172 45.212,28.829 49.275,28.829 49.421,28.683 49.421,27.793
GND on Top Layer "GND_L01_P005" (solid, remove dead copper, pour order 5): 14.509,28.536 15.494,28.536 15.494,22.385 15.424,22.455 14.507,22.455 14.507,28.534
5V on Top Layer "5V_L01_P002" (solid, pour order 2): 50.972,27.788 50.974,27.786 50.974,27.391 44.305,27.391 44.271,27.425 44.31,27.464 44.31,28.829 49.148,28.829 49.294,28.683 49.294,27.793 50.974,27.793 50.975,27.792
GND on Top Layer "GND_L01_P000" (solid, pour order 0): 50.974,25.839 50.977,25.836 50.977,24.792 49.624,24.792 49.149,24.792 49.167,23.31 46.736,23.31 46.736,25.839
GND on Int1 (GND) (split plane): 54.989,0.51 0.51,0.51 0.51,57.91 54.989,57.91
GND on Int2 (PWR) (split plane): 54.989,0.51 0.51,0.51 0.51,57.91 54.989,57.91

## Silkscreen, mask and mechanical layers (free items; w line width, h text height)
Top Overlay:
  region: 1128 vertices and 0 holes, not listed, extent 46.509,46.89 53.984,50.321

## Text inside footprints (layer, text, board x,y; h text height)
D1: Top Overlay "A" at 52.585,7.869 h0.6 r90; Top Overlay "K" at 52.532,12.333 h0.6 r90
D2: Top Overlay "A" at 17.789,32.924 h0.6 r90; Top Overlay "K" at 17.737,37.388 h0.6 r90
J3: Mechanical 13 "PCB EDGE" at 55,27.434 h0.41 r90